# EAGLE board BHOnOfreDevBoard (EAGLE 8.3.2)
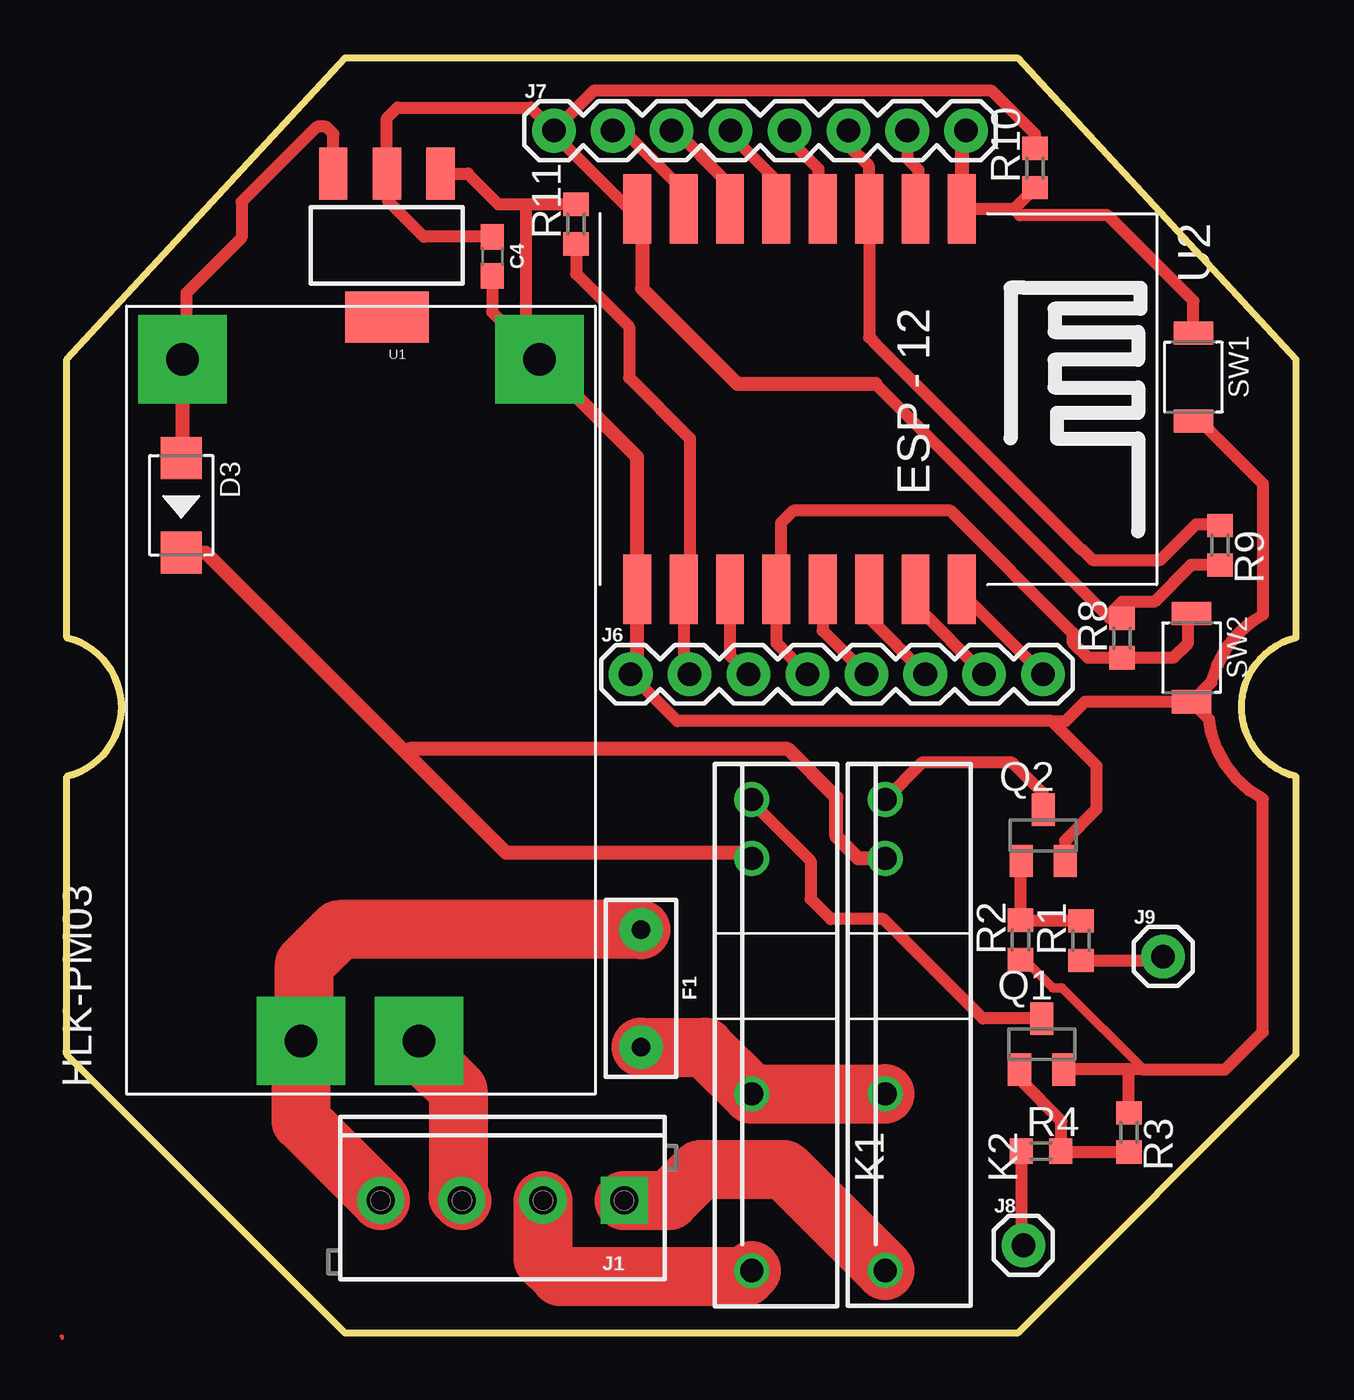
[diagram p0: board, top side]

Size 53 x 55 mm. Coordinates in mm from the lower left corner, seen from the top.
Outline: 53,12 41,0 12,0 0,12 0,24 arc152 0,30 0,42 12,55 41,55 53,42 53,30 arc152 53,24 53,12
Copper layers (1*16): Top 0.035mm / dielectric 1.5mm / Bottom 0.035mm
Design rules "default": minimum track width 6mil, minimum drill 0.35mm, track to track 6mil, track to pad 6mil, pad to pad 6mil, via to via 6mil, smd to smd 6mil, copper to edge 40mil, drill to drill 6mil, minimum pad ring 10mil, minimum via ring 8mil, stop-mask expansion 4mil, vias tented up to drill 0mil, thermal gap 10mil
Net classes: 1 220V: clearance 2.54 mm

## Footprints (pad centres in the part's own frame; a part is rotated, then mirrored left to right if it is on the bottom)
0603 = smd 1.1 x 1: 1 -0.85,0; 2 0.85,0
DO-214AC = smd 1.8 x 1.77: 1 -2.042,0; 2 2.042,0
PTH = drill 0.8 pad 1.88: P$1 -2.54,0; P$2 2.54,0
SCREWTERMINAL-3.5MM-4 = drill 1.2 pad 2.032 square: 1 0,0 | drill 1.2 pad 2.032: 2 3.5,0; 3 7,0; 4 10.5,0
1X08 = drill 1.016 pad 1.88: 1 0,0; 2 2.54,0; 3 5.08,0; 4 7.62,0; 5 10.16,0; 6 12.7,0; 7 15.24,0; 8 17.78,0
1X01 = drill 1.016 pad 1.88: 1 0,0
OMRON-G3MB-202P-SSR = drill 1: 1 -12.7,0; 2 -5.08,0; 3 5.08,0; 4 7.62,0
SOT23 = smd 1 x 1.4: 1 -0.95,-1.1; 2 0.95,-1.1; 3 0,1.1
R0603 = smd 1 x 1.1: 1 -0.85,0; 2 0.85,0
SW2-2.6-3.0X2.5X1.2+0.4MM = smd 1 x 1.7: 1 -1.9,0; 2 1.9,0
SOT223 = smd 1.219 x 2.235: 1 -2.311,-3.099; 2 0,-3.099; 3 2.311,-3.099 | smd 3.6 x 2.2: 4 0,3.099
ESP12-SMD = smd 3 x 1.2: ADC -8.3,3.8; CH_PD -8.3,1.8; GND 8.1,-8.2; GPIO0 8.1,-2.2; GPIO2 8.1,-4.2; GPIO4 8.1,1.8; GPIO5 8.1,-0.2; GPIO12 -8.3,-4.2; GPIO13 -8.3,-6.2; GPIO14 -8.3,-2.2; GPIO15 8.1,-6.2; GPIO16 -8.3,-0.2; RESET -8.3,5.8; RXD0 8.1,3.8; TXD0 8.1,5.8; VCC -8.3,-8.2
HLK-PM03 = drill 1.4 pad 3.81 square: +VO 29.4,10.2; -VO 29.4,-5.2; AC1 0,5.08; AC2 0,0

## Placement (x,y rotation side)
C4  100nF  [0603]  18.35,46.44 270 top
D3  1N4004  [DO-214AC]  4.93,35.7 270 top
F1  FUSE 2A  [PTH]  24.77,14.87 270 top
J1  [SCREWTERMINAL-3.5MM-4]  24.03,5.72 180 top
J6  [1X08]  24.32,28.41 0 top
J7  [1X08]  21,51.86 0 top
J8  [1X01]  41.25,3.79 0 top
J9  [1X01]  47.27,16.24 0 top
K1  OMRON-G3MB-202P-SSR2  [OMRON-G3MB-202P-SSR]  29.53,15.39 90 top
K2  OMRON-G3MB-202P-SSR2  [OMRON-G3MB-202P-SSR]  35.29,15.4 90 top
Q1  S8050  [SOT23]  42.03,12.46 0 top
Q2  S8050  [SOT23]  42.1,21.46 0 top
R1  10k  [R0603]  43.74,16.93 90 top
R2  10k  [R0603]  41.13,16.96 90 top
R3  10k  [R0603]  45.8,8.65 270 top
R4  10k  [R0603]  42.01,7.84 0 top
R8  10k  [R0603]  45.51,29.98 90 top
R9  10k  [R0603]  49.72,33.98 270 top
R10  10k  [R0603]  41.75,50.25 90 top
R11  10k  [R0603]  21.96,47.83 90 top
SW1  B3U-1000P-2P-SMD  [SW2-2.6-3.0X2.5X1.2+0.4MM]  48.57,41.23 270 top
SW2  B3U-1000P-2P-SMD  [SW2-2.6-3.0X2.5X1.2+0.4MM]  48.5,29.13 270 top
U1  [SOT223]  13.8,46.91 180 top
U2  [ESP12-SMD]  32.8,40.18 270 top
U$2  HLK-PM03  [HLK-PM03]  15.18,12.6 90 top

## Library data of the parts
C4 = SparkFun-Capacitors; PROD_ID: CAP-00867
D3 = Seeed-Diode; MPN: 1N4007
F1 = SparkFun-Fuses; PROD_ID: RES-08490
J1 = SparkFun-Connectors; PROD_ID: 2xCONN-08399; SF_ID: 2xPRT-08084
J6 J7 = SparkFun-Connectors; PROD_ID: CONN-08438
J8 J9 = SparkFun-Connectors
K1 K2 = Omron G3MB 202p SSR; MPN: S202S02F; OC_FARNELL: 1618475; OC_NEWARK: 14N9588
Q1 Q2 = semicon-smd-ipc
R1-R4 R8-R11 = resistor
SW1 SW2 = Seeed-Switch; MPN: B3U-1000P-2P-SMD
U1 = SparkFun-IC-Power; PROD_ID: VREG-08170
U2 = esp8266modules
U$2 = PowerSocket

## Nets
3V3: C4.1 J7.1 R8.2 R9.2 R10.2 U1.2 U2.VCC
ADC: J7.7 U2.ADC
CH_PD: J7.6 R9.1 U2.CH_PD
FASE: J1.3 U$2.AC2
GND: C4.2 J6.1 Q1.2 Q2.2 R2.1 R3.1 R11.2 SW1.2 SW2.2 U1.1 U2.GND U$2.-VO
GPIO0: J6.4 R8.1 SW2.1 U2.GPIO0
GPIO02: J6.3 U2.GPIO2
GPIO04: J6.6 U2.GPIO4
GPIO05: J6.5 U2.GPIO5
GPIO12: J7.3 U2.GPIO12
GPIO13: J7.2 U2.GPIO13
GPIO14: J7.4 U2.GPIO14
GPIO15: J6.2 R11.1 U2.GPIO15
GPIO16: J7.5 U2.GPIO16
N$1: K1.4 Q1.3
N$2: D3.2 K1.3 K2.3
N$7: Q1.1 R3.2 R4.2
N$9: K2.4 Q2.3
N$13: Q2.1 R1.2 R2.2
NEUTRAL_IN: F1.P$1 J1.4 U$2.AC1
NEUTRAL_IN_FUSED: F1.P$2 K1.2 K2.2
NEUTRAL_ONE_OUT: J1.2 K1.1
NEUTRAL_TWO_OUT: J1.1 K2.1
R1: J8.1 R4.1
R2: J9.1 R1.1
RESET: J7.8 R10.1 SW1.1 U2.RESET
RX: J6.7 U2.RXD0
TX: J6.8 U2.TXD0
VCC: D3.1 U1.3 U$2.+VO

## Tracks (layer width: path | path; a pad name or v marks a point on that pad's centre or on a via)
3V3
  Top 0.508: J7.1 22.71,53.58 39.89,53.58 41.75,51.72 R10.2 | J7.1 21,51.72 24.81,47.92 | J7.1 20.01,52.86 14.26,52.86 13.8,52.4 U1.2 13.86,49.96 13.86,48.83 15.4,47.29 C4.1 | R8.2 44.98,30.83 44.88,30.93 | 44.88,30.93 34.87,40.93 | R9.2 48.47,33.13 46.88,31.54 45.5,31.54 44.88,30.93
  Top 0.61: 34.87,40.93 28.93,40.93 24.81,45.06 24.81,47.92 24.81,48.27 U2.VCC
ADC
  Top 0.508: J7.7 36.24,50.66 36.72,50.18 36.72,48.61 U2.ADC
CH_PD
  Top 0.508: 34.65,48.43 U2.CH_PD | J7.6 33.7,51.24 34.57,50.37 34.57,48.51 U2.CH_PD | U2.CH_PD 34.6,42.95 34.91,42.63 43.77,33.78 43.81,33.78 44.23,33.35 47.15,33.35 48.69,34.89 49.66,34.89 R9.1
FASE
  Top 2.54: U$2.AC2 15.18,12.18 16.88,10.48 16.88,5.88 J1.3
GND
  Top 0.406: R2.1 41.29,16.11 42.51,14.89 42.9,14.89 46.43,11.36
  Top 0.508: U1.1 17.29,50.01 18.62,48.68 19.78,48.68 | 20.98,42.6 U$2.-VO 19.69,42.69 19.78,42.78 19.78,48.68 | R11.2 19.78,48.68 | SW1.2 48.88,39.33 51.58,36.64 51.58,30.97 50.97,30.58 50.42,30.07 49.96,29.48 49.6,28.82 49.36,28.11 49.35,28.08 SW2.2 | SW2.2 43.9,27.23 43.07,26.4 42.47,26.4 | 42.47,26.4 26.33,26.4 J6.1 | Q2.2 43.05,21.24 44.41,22.59 44.41,24.46 42.47,26.4 | 45.71,11.36 46.43,11.36 49.95,11.36 51.58,12.99 51.58,23.03 50.97,23.42 50.42,23.93 49.96,24.52 49.6,25.18 49.36,25.89 49.26,26.47 SW2.2 | 45.71,11.36 Q1.2 | R3.1 45.8,11.28 45.71,11.36 | C4.2 18.34,44.04 21.04,41.34
  Top 0.61: J6.1 24.6,28.69 U2.GND 24.6,37.79 21.04,41.34 U$2.-VO 19.53,42
GPIO0
  Top 0.508: J6.4 30.6,29.75 U2.GPIO0 30.79,32.28 30.79,34.93 31.33,35.47 38.11,35.47 43.38,30.2 43.38,29.77 44.02,29.13 R8.1 47.7,29.13 48.35,29.77 48.35,30.88 SW2.1
GPIO02
  Top 0.508: U2.GPIO2 28.6,29.21 J6.3
GPIO04
  Top 0.508: U2.GPIO4 34.6,30.83 J6.6
GPIO05
  Top 0.508: U2.GPIO5 32.6,30.29 33.43,29.46 | 33.43,29.46 33.62,29.27 | J6.5 33.43,29.46
GPIO12
  Top 0.508: J7.3 26.25,51.86 28.37,49.74 28.37,48.71 U2.GPIO12
GPIO13
  Top 0.508: J7.2 24.02,51.86 26.4,49.48 26.4,48.67 U2.GPIO13
GPIO14
  Top 0.508: J7.4 28.62,51.68 30.6,49.7 U2.GPIO14
GPIO15
  Top 0.508: 26.61,32.1 26.75,32.24 | 26.61,32.1 U2.GPIO15 26.6,28.67 J6.2 | R11.1 21.96,45.69 24.25,43.4 24.25,41.21 26.87,38.59 26.87,32.36 26.61,32.1
GPIO16
  Top 0.508: J7.5 31.16,51.47 32.41,50.22 32.41,48.67 U2.GPIO16
N$1
  Top 0.508: K1.4 29.53,22.9 32.08,20.36 32.08,18.72 32.93,17.86 35.21,17.86 39.5,13.56 Q1.3
N$2
  Top 0.61: D3.2 6,33.66 14.63,25.03 | 14.63,25.03 18.94,20.72 29.28,20.72 K1.3 | K2.3 34.12,20.48 33.18,21.42 33.18,23.11 31.1,25.19 14.78,25.19 14.63,25.03
N$4
  Top 0.15: -0.23,-0.15 -0.19,-0.15 -0.19,-0.22
N$7
  Top 0.508: Q1.1 41.08,10.94 42.88,9.14 42.88,7.91 | 42.88,7.91 42.88,7.87 R4.2 | R3.2 42.99,7.8 42.88,7.91
N$9
  Top 0.508: Q2.3 42.1,23.27 40.76,24.61 36.87,24.61 K2.4
N$13
  Top 0.508: Q2.1 41.13,20.34 R2.2 41.16,17.78 R1.2
NEUTRAL_IN
  Top 2.54: J1.4 10.1,9.15 U$2.AC1 10.24,12.73 10.24,15.91 11.74,17.41 F1.P$1
NEUTRAL_IN_FUSED
  Top 2.54: F1.P$2 27.52,12.33 K1.2 K2.2
NEUTRAL_ONE_OUT
  Top 2.54: J1.2 20.53,3.18 21.27,2.44 29.28,2.44 K1.1
NEUTRAL_TWO_OUT
  Top 2.54: J1.1 25.98,5.72 27.31,7.05 30.93,7.05 K2.1
R1
  Top 0.508: R4.1 41.16,3.49 J8.1
R2
  Top 0.508: R1.1 47.11,16.08 J9.1
RESET
  Top 0.508: 40.84,48.48 U2.RESET | 40.84,48.48 R10.1 | SW1.1 48.57,44.52 44.88,48.21 41.11,48.21 40.84,48.48
  Top 0.61: U2.RESET 38.6,51.94 J7.8
RX
  Top 0.508: U2.RXD0 36.6,31.37 J6.7
TX
  Top 0.508: U2.TXD0 38.6,31.91 J6.8
VCC
  Top 0.508: U1.3 11.49,51.73 11.19,52.03 10.78,52.03 7.54,48.79 7.54,47.25 5.16,44.86 5.16,42.17 U$2.+VO
  Top 0.61: U$2.+VO 4.98,37.8 D3.1